# Altium PCB 2020-04-02-04-30101 - PCB2.PcbDoc
Units mm, origin at the board's own origin, x right, y up, seen from the top; angles counter-clockwise.
Board outline 140 x 35 mm, 2 copper layers (Top Layer, Bottom Layer); 5 components, 15 nets, 33 pads, 0 vias.
Unrouted connection lines stored in the file: 15.
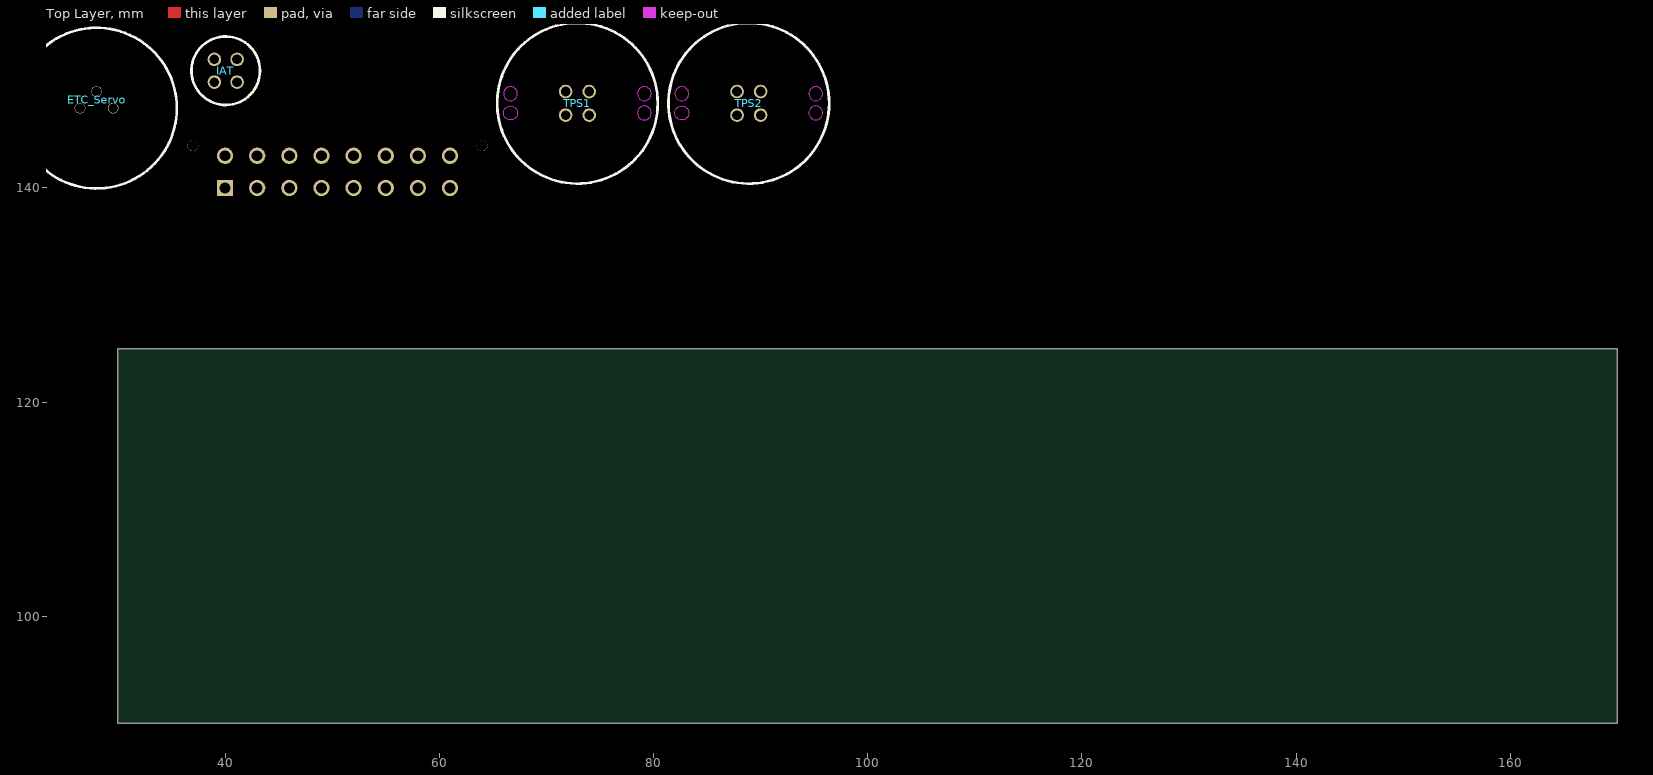
[diagram p0: Top Layer view]
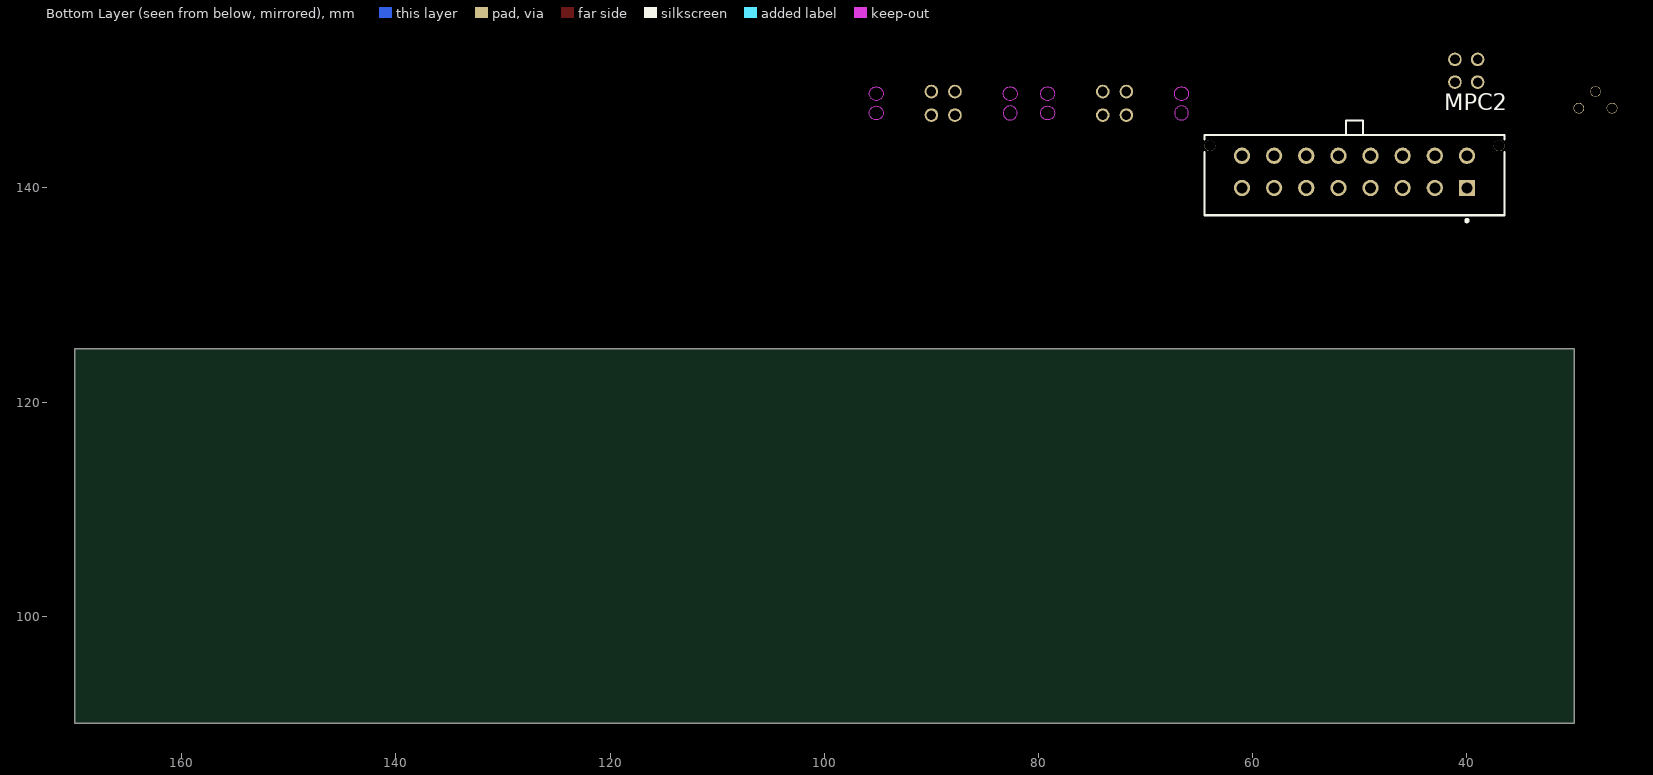
[diagram p1: Bottom Layer view, seen from below]

## Layer stack, top to bottom
Top Solder: solder mask 0.0102, Solder Resist, Dk 3.5
Top Layer: signal copper 0.0356
Dielectric 1: dielectric 0.32, FR-4, Dk 4.8
Bottom Layer: signal copper 0.0356
Bottom Solder: solder mask 0.0102, Solder Resist, Dk 3.5

## Board outline
30,90 170,90 170,125 30,125

## Design rules (kind name [scope] priority, off if disabled: settings)
Clearance [All] p1: gap=0.254 ignorepadtopadclearanceinfootprint=FALSE except(0: Arc-Hole Track-Hole SMDPad-Hole THPad-Hole Via-Hole Fill-Hole Poly-Hole Region-Hole Text-Hole)
PolygonConnect [All] p1: connectstyle=Relief reliefconductorwidth=0.254 reliefentries=4 polygonreliefangle="90 Angle" airgapwidth=0.254
RoutingVias [All] p1: holewidth=0.711 width=1.27 viastyle="Through Hole" minholewidth=0.711 minwidth=1.27 maxholewidth=0.711 maxwidth=1.27
SolderMaskExpansion [All] p1: expansion=0.102
Width [All] p1: maxlimit=0.254 minlimit=0.254 preferedwidth=0.254
30 further rules are at their usual default settings.

## Components (designator, comment, footprint, x,y, rotation, side; value= is the part's Value field where it differs from the comment)
ETC_Servo "09_0408_90_03" 09_0408_90_03 28,147.45 r0 top
IAT "09 9766 20 04" "09 9766 20 04" 40.06,150.94 r0 top
MPC2 "66201621122" 66201621122 50.5,141.2 r180 bottom
TPS1 "Binder_4Pin_Schraub_Female" "09 0412 30 04" 72.9,147.9 r0 top
TPS2 "Binder_4Pin_Schraub_Female" "09 0412 30 04" 88.9,147.9 r0 top

## Footprints (in the part's own frame and the unit in brackets; to place one, negate y for a bottom-side part, rotate by r counter-clockwise, add the part's x,y. Pads: shape width x height; smd on the part's side, far side on the other; paste and mask are expansions set on the pad)
"09 0412 30 04" [mm] "M9 IP67 Flanschdose, Polzahl: 4, schirmbar, mit Schirmblech, tauchlöten, IP67"
  round 1.27 / inner rect 1.27x2.54 / far side round 1.27 hole 0.9: 1(-1.1,-1.1) 2(-1.1,1.1) 3(1.1,1.1) 4(1.1,-1.1)
  Keep-Out Layer board cut-out: 5.6,-0.9 5.649,-1.149 5.79,-1.36 6.001,-1.501 6.25,-1.55 6.25,-1.55 6.499,-1.501 6.71,-1.36 6.851,-1.149 6.9,-0.9 6.9,-0.9 6.851,-0.651 6.71,-0.44 6.499,-0.299 6.25,-0.25 6.25,-0.25 6.001,-0.299 5.79,-0.44 5.649,-0.651 5.6,-0.9
  Keep-Out Layer board cut-out: 5.6,0.9 5.649,0.651 5.79,0.44 6.001,0.299 6.25,0.25 6.25,0.25 6.499,0.299 6.71,0.44 6.851,0.651 6.9,0.9 6.9,0.9 6.851,1.149 6.71,1.36 6.499,1.501 6.25,1.55 6.25,1.55 6.001,1.501 5.79,1.36 5.649,1.149 5.6,0.9
  Keep-Out Layer board cut-out: -6.25,0.25 -6.001,0.299 -5.79,0.44 -5.649,0.651 -5.6,0.9 -5.6,0.9 -5.649,1.149 -5.79,1.36 -6.001,1.501 -6.25,1.55 -6.25,1.55 -6.499,1.501 -6.71,1.36 -6.851,1.149 -6.9,0.9 -6.9,0.9 -6.851,0.651 -6.71,0.44 -6.499,0.299 -6.25,0.25
  Keep-Out Layer board cut-out: -6.25,-1.55 -6.499,-1.501 -6.71,-1.36 -6.851,-1.149 -6.9,-0.9 -6.9,-0.9 -6.851,-0.651 -6.71,-0.44 -6.499,-0.299 -6.25,-0.25 -6.25,-0.25 -6.001,-0.299 -5.79,-0.44 -5.649,-0.651 -5.6,-0.9 -5.6,-0.9 -5.649,-1.149 -5.79,-1.36 -6.001,-1.501 -6.25,-1.55
  silkscreen extent -7.5,-7.5 7.5,7.5, body extent -7.5,-7.5 7.5,7.5, height 12.65
"09 9766 20 04" [mm] "Binder_4pin_snapin_female"
  round 1.27 / inner rect 1.27x2.54 / far side round 1.27 hole 0.9: 1(-1.06,-1.06) 2(-1.06,1.06) 3(1.06,1.06) 4(1.06,-1.06)
  silkscreen extent -3.2,-3.2 3.2,3.2, body extent -4,-4.35 4,4.35, height 14.4
09_0408_90_03 [mm]
  round 1 hole 0.9: 1(-1.55,0) 2(0,1.55) 3(1.55,0)
  silkscreen extent -7.5,-7.5 7.5,7.5, body extent -7.5,-7.5 7.5,7.5, height 12
66201621122 [mm] "Dual row Vertical header 16p"
  rect 1.52x1.52 hole 1.02: 1(10.5,-1.2)
  round 1.52 hole 1.02: 2(7.5,-1.2) 3(4.5,-1.2) 4(1.5,-1.2) 5(-1.5,-1.2) 6(-4.5,-1.2) 7(-7.5,-1.2) 8(-10.5,-1.2) 9(10.5,1.8) 10(7.5,1.8) 11(4.5,1.8) 12(1.5,1.8) 13(-1.5,1.8) 14(-4.5,1.8) 15(-7.5,1.8) 16(-10.5,1.8)
  round 1.02 hole 1.02 unplated: MH1(-13.5,2.74) MH2(13.5,2.74)
  silkscreen extent -14,-4.37 14,5.08, body extent -13.85,-3.68 13.85,5.08, height 9.93

## Part data
IAT: "Binder 4 Pin Female SnapIn"
MPC2: "THT Male Header WR-MPC3, Vertical, Dual Row, pitch 3 mm, 16 pins", Contact Resistance="10 mOhm", Operating Temperature="-40 to 105 degC", Working Voltage="250 VAC", ComponentLink1Description=Manufacturer, ComponentLink1URL=http://www.we-online.de, ComponentLink2Description=Datasheet, ComponentLink2URL=https://katalog.we-online.de/em/datasheet/6620xx21122.pdf, Gender=Male, Mounting Technology=THT, Orientation=Vertical, Packaging=Tube, Part Number=66201621122, Pin Number=16, Pitch="3 mm", Published Date="September 2018", Publisher="Wurth Elektronik"

## Nets (pads, with @x,y where several pads share a name; then routed paths per layer and width w, separated by ;. In a path a pad name is that pad's centre, name@x,y a point inside that pad or via, vN(x,y) a via of type N, cw(c..) or ccw(c..) an arc to the next point about the centre after c; other vN are vias at no path point)
NetETC_Servo_1: ETC_Servo.1 MPC2.8
NetETC_Servo_2: ETC_Servo.2 MPC2.7
NetETC_Servo_3: ETC_Servo.3 MPC2.6
NetIAT_1: IAT.1 MPC2.4
NetIAT_2: IAT.2 MPC2.3
NetIAT_3: IAT.3 MPC2.2
NetIAT_4: IAT.4 MPC2.1
NetMPC2_9: MPC2.9 TPS1.1
NetMPC2_10: MPC2.10 TPS1.2
NetMPC2_11: MPC2.11 TPS1.3
NetMPC2_12: MPC2.12 TPS1.4
NetMPC2_13: MPC2.13 TPS2.1
NetMPC2_14: MPC2.14 TPS2.2
NetMPC2_15: MPC2.15 TPS2.3
NetMPC2_16: MPC2.16 TPS2.4
pads on no net: MPC2.5 MPC2.MH1 MPC2.MH2